# Altium PCB Cap_Sensor_Hand.PcbDoc
Units mil, origin at the board's own origin, x right, y up, seen from the top; angles counter-clockwise.
Board outline 6000 x 4000 mil, 2 copper layers (Top Layer, Bottom Layer); 44 components, 74 nets, 256 pads, 0 vias.
Unrouted connection lines stored in the file: 159.
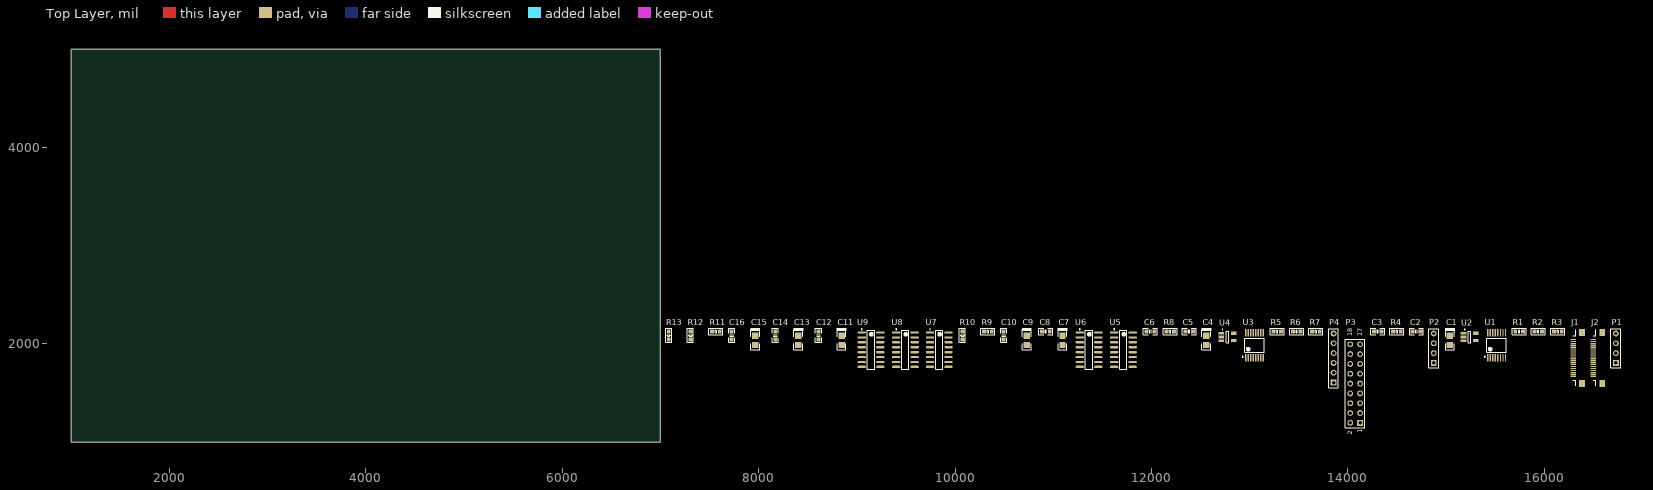
[diagram p0: Top Layer view]
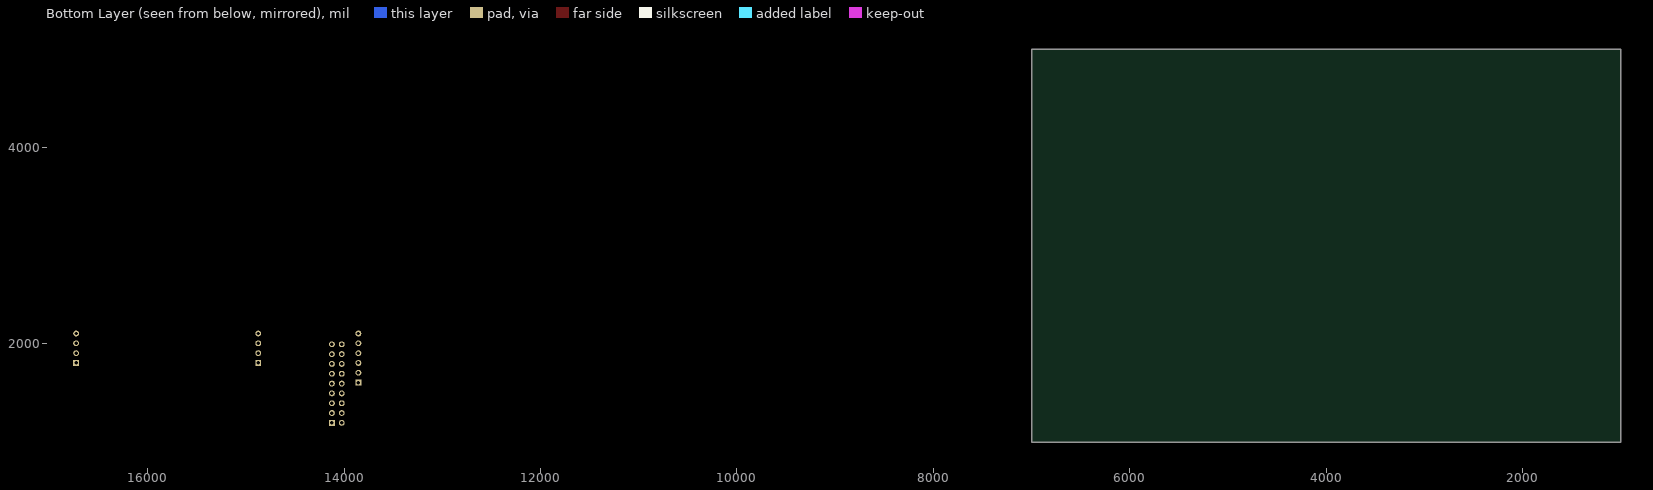
[diagram p1: Bottom Layer view, seen from below]

## Layer stack, top to bottom
Top Solder: solder mask 0.4, Solder Resist, Dk 3.5
Top Layer: signal copper 1.4
Dielectric 1: dielectric 12.6, FR-4, Dk 4.8
Bottom Layer: signal copper 1.4
Bottom Solder: solder mask 0.4, Solder Resist, Dk 3.5

## Board outline
1000,1000 7000,1000 7000,5000 1000,5000

## Design rules (kind name [scope] priority, off if disabled: settings)
Clearance [All] p1: gap=10 ignorepadtopadclearanceinfootprint=FALSE except(0: Arc-Hole Track-Hole SMDPad-Hole THPad-Hole Via-Hole Fill-Hole Poly-Hole Region-Hole Text-Hole)
PolygonConnect [All] p1: connectstyle=Relief reliefconductorwidth=10 reliefentries=4 polygonreliefangle="90 Angle" airgapwidth=10
RoomDefinition Cap_Sensor_Hand [InComponentClass('Cap_Sensor_Hand')] p1: confinementstyle=ConfineIn formatcopy=TRUE lockcomponents=FALSE outline 7045,1060 16790,1060 16790,2265 7045,2265
RoutingVias [All] p1: holewidth=28 width=50 viastyle="Through Hole" minholewidth=28 minwidth=50 maxholewidth=28 maxwidth=50
SolderMaskExpansion [All] p1: expansion=4
Width [All] p1: maxlimit=10 minlimit=10 preferedwidth=10
30 further rules are at their usual default settings.

## Components (designator, comment, footprint, x,y, rotation, side; value= is the part's Value field where it differs from the comment)
C1 "Cap Pol2" Cap-TA 15040,2035 r90 top value=10uF
C2 "Cap" 0805C 14700,2125 r0 top value=100nF
C3 "Cap" 0805C 14305,2125 r0 top value=100nF
C4 "Cap Pol2" Cap-TA 12560,2035 r90 top value=10uF
C5 "Cap" 0805C 12385,2125 r0 top value=100nF
C6 "Cap" 0805C 11990,2125 r0 top value=100nF
C7 "Cap Pol2" Cap-TA 11095,2035 r90 top value=10uF
C8 "Cap" 0805C 10925,2125 r0 top value=100nF
C9 "Cap Pol2" Cap-TA 10730,2035 r90 top value=10uF
C10 "Cap" 0805C 10495,2085 r90 top value=100nF
C11 "Cap Pol2" Cap-TA 8845,2035 r90 top value=10uF
C12 "Cap" 0805C 8610,2085 r90 top value=100nF
C13 "Cap Pol2" Cap-TA 8405,2035 r90 top value=10uF
C14 "Cap" 0805C 8170,2085 r90 top value=100nF
C15 "Cap Pol2" Cap-TA 7965,2035 r90 top value=10uF
C16 "Cap" 0805C 7725,2085 r90 top value=100nF
J1 "FPC-20P" FPC20-0.5 16295,1670 r90 top
J2 "FPC-20P" FPC20-0.5 16500,1670 r90 top
P1 "Header 4" HDR1X4 16730,1805 r90 top
P2 "Header 4" HDR1X4 14875,1805 r90 top
P3 "Header 9X2" HDR2X9 14125,1195 r90 top
P4 "Header 6" HDR1X6 13855,1605 r90 top
R1 "Res" 0805R 15745,2125 r0 top value=100k
R2 "Res" 0805R 15940,2125 r0 top value=3k3
R3 "Res" 0805R 16140,2125 r0 top value=3k3
R4 "Res" 0805R 14500,2125 r0 top value=118k
R5 "Res" 0805R 13280,2125 r0 top value=100k
R6 "Res" 0805R 13480,2125 r0 top value=3k3
R7 "Res" 0805R 13675,2125 r0 top value=3k3
R8 "Res" 0805R 12190,2125 r0 top value=118k
R9 "Res" 0805R 10335,2125 r0 top value=0R
R10 "Res" 0805R 10075,2085 r90 top value=0R
R11 "Res" 0805R 7565,2125 r0 top value=0R
R12 "Res" 0805R 7305,2085 r90 top value=0R
R13 "Res" 0805R 7085,2085 r90 top value=0R
U1 "AD7746" TSSOP16 15515,1985 r90 top
U2 "AD8515" sot23-5 15240,2070 r0 top
U3 "AD7746" TSSOP16 13050,1985 r90 top
U4 "AD8515" sot23-5 12775,2070 r0 top
U5 "CD4052" sop16 11715,1940 r0 top
U6 "CD4052" SOP16 11365,1940 r0 top
U7 "CD4052" sop16 9840,1940 r0 top
U8 "CD4052" sop16 9495,1940 r0 top
U9 "CD4052" sop16 9145,1940 r0 top

## Footprints (in the part's own frame and the unit in brackets; to place one, negate y for a bottom-side part, rotate by r counter-clockwise, add the part's x,y. Pads: shape width x height; smd on the part's side, far side on the other; paste and mask are expansions set on the pad)
0805C [mm]
  rect 1x1 smd: 1(-1,0) 2(1,0)
  silkscreen extent -1.8,-0.8 1.8,0.8, body extent -1.01,-0.62 1,0.63, height 0.92
0805R [mm]
  rect 1x1 smd: 1(-1,0) 2(1,0)
  silkscreen extent -1.8,-0.8 1.8,0.8, body extent -1,-0.63 1,0.63, height 0.55
Cap-TA [mm]
  rect 1.6x1.65 smd: 1(1.2,0) 2(-1.2,0)
  silkscreen extent -2.41,-1.27 3.17,1.27, body extent -1.6,-0.8 1.6,0.8, height 1.61
FPC20-0.5 [mm]
  rect 0.3x1.4 smd: 1(0,0) 2(0.5,0) 3(1,0) 4(1.5,0) 5(2,0) 6(2.5,0) 7(3,0) 8(3.5,0) 9(4,0) 10(4.5,0) 11(5,0) 12(5.5,0) 13(6,0) 14(6.5,0) 15(7,0) 16(7.5,0) 17(8,0) 18(8.5,0) 19(9,0) 20(9.5,0)
  rect 1.8x1.5 smd: 21(-1.85,-2.3) 22(11.35,-2.3)
  silkscreen extent -2.48,-0.64 11.98,0.06
HDR1X4 [mm] "Connector; Header; 4 Position"
  rect 1.5x1.5 hole 0.9: 1(0,0)
  round 1.5 hole 0.9: 2(2.54,0) 3(5.08,0) 4(7.62,0)
  silkscreen extent -1.27,-1.27 8.89,1.27
HDR1X6 [mm] "Connector; Header; 6 Position"
  rect 1.5x1.5 hole 0.9: 1(0,0)
  round 1.5 hole 0.9: 2(2.54,0) 3(5.08,0) 4(7.62,0) 5(10.16,0) 6(12.7,0)
  silkscreen extent -1.27,-1.27 13.97,1.27
HDR2X9 [mm] "Connector; Header; 9x2 Position"
  rect 1.5x1.5 hole 0.9: 1(0,0)
  round 1.5 hole 0.9: 2(0,2.54) 3(2.54,0) 4(2.54,2.54) 5(5.08,0) 6(5.08,2.54) 7(7.62,0) 8(7.62,2.54) 9(10.16,0) 10(10.16,2.54) 11(12.7,0) 12(12.7,2.54) 13(15.24,0) 14(15.24,2.54) 15(17.78,0) 16(17.78,2.54) 17(20.32,0) 18(20.32,2.54)
  silkscreen extent -1.27,-1.27 21.59,3.81
sop16 [mm] "SOP, 16-Leads, Body 10.0x4.0mm (max), Pitch 1.27mm, IPC Medium Density"
  oval 2.15x0.6 smd: 1(-2.4,4.445) 2(-2.4,3.175) 3(-2.4,1.905) 4(-2.4,0.635) 5(-2.4,-0.635) 6(-2.4,-1.905) 7(-2.4,-3.175) 8(-2.4,-4.445) 9(2.4,-4.445) 10(2.4,-3.175) 11(2.4,-1.905) 12(2.4,-0.635) 13(2.4,0.635) 14(2.4,1.905) 15(2.4,3.175) 16(2.4,4.445)
  silkscreen extent -2.52,-5 0.92,5.42, body extent -2,-5 2,5, height 1.75
SOP16 [mm] "SOP, 16-Leads, Body 10.0x4.0mm (max), Pitch 1.27mm, IPC Medium Density"
  oval 2.15x0.6 smd: 1(-2.4,4.445) 2(-2.4,3.175) 3(-2.4,1.905) 4(-2.4,0.635) 5(-2.4,-0.635) 6(-2.4,-1.905) 7(-2.4,-3.175) 8(-2.4,-4.445) 9(2.4,-4.445) 10(2.4,-3.175) 11(2.4,-1.905) 12(2.4,-0.635) 13(2.4,0.635) 14(2.4,1.905) 15(2.4,3.175) 16(2.4,4.445)
  silkscreen extent -2.52,-5 0.92,5.42, body extent -2,-5 2,5, height 1.75
sot23-5 [mm]
  rect 1.5x0.7 smd: 1(-1.595,0.95) 2(-1.595,0) 3(-1.595,-0.95)
  rect 1.5x0.85 smd: 4(1.595,-0.95) 5(1.595,0.95)
  silkscreen extent -1.42,-1.5 0.3,2.05, body extent -1.39,-1.46 1.41,1.44, height 1.09
TSSOP16 [mm]
  oval 2x0.3 smd: 1(-3.25,2.275) 2(-3.25,1.625) 3(-3.25,0.975) 4(-3.25,0.325) 5(-3.25,-0.325) 6(-3.25,-0.975) 7(-3.25,-1.625) 8(-3.25,-2.275) 9(3.25,-2.275) 10(3.25,-1.625) 11(3.25,-0.975) 12(3.25,-0.325) 13(3.25,0.325) 14(3.25,0.975) 15(3.25,1.625) 16(3.25,2.275)
  silkscreen extent -3.12,-2.55 1.83,3.17, body extent -2.85,-2.56 2.85,2.54, height 1.45

## Part data
C1 C4 C7 C9 C11 C13 C15: "Polarized Capacitor (Axial)", LatestRevisionDate=17-Jul-2002, LatestRevisionNote="Re-released for DXP Platform.", PackageDescription="Polarized Capacitor; 2 Leads", PackageReference=POLAR0.8, Published=8-Jun-2000, Publisher="Altium Limited"
C2 C3 C5 C6 C8 C10 C12 C14 C16: "Capacitor", LatestRevisionDate=17-Jul-2002, LatestRevisionNote="Re-released for DXP Platform.", PackageDescription="Radial Cap, Thru-Hole; 2 Leads; 0.3 in Pin Spacing", PackageReference=RAD-0.3, Published=8-Jun-2000, Publisher="Altium Limited"
J1 J2: library part FPC_20P
P1 P2: "Header, 4-Pin", LatestRevisionDate=17-Jul-2002, LatestRevisionNote="Re-released for DXP Platform.", Publisher="Altium Limited"
P3: "Header, 9-Pin, Dual row", LatestRevisionDate=17-Jul-2002, LatestRevisionNote="Re-released for DXP Platform.", Publisher="Altium Limited"
P4: "Header, 6-Pin", LatestRevisionDate=17-Jul-2002, LatestRevisionNote="Re-released for DXP Platform.", Publisher="Altium Limited"
R1 R2 R3 R4 R5 R6 R7 R8 R9 R10 R11 R12 R13: "Resistor", LatestRevisionDate=17-Jul-2002, LatestRevisionNote="Re-released for DXP Platform.", PackageDescription="Axial Device, Thru-Hole; 2 Leads; 0.4 in Pin Spacing", PackageReference=AXIAL-0.4, Published=8-Jun-2000, Publisher="Altium Limited"

## Nets (pads, with @x,y where several pads share a name; then routed paths per layer and width w, separated by ;. In a path a pad name is that pad's centre, name@x,y a point inside that pad or via, vN(x,y) a via of type N, cw(c..) or ccw(c..) an arc to the next point about the centre after c; other vN are vias at no path point)
AD7746_A_SCL: P4.1 R2.1 U1.1
AD7746_A_SDA: P4.2 R3.1 U1.16
AD7746_B_SCL: P4.4 R6.1 U3.1
AD7746_B_SDA: P4.5 R7.1 U3.16
GND: C1.2 C2.1 C3.1 C4.2 C5.1 C6.1 C7.2 C8.1 C9.2 C10.1 C11.2 C12.1 C13.2 C14.1 C15.2 C16.1 P1.3 P1.4 P2.3 P2.4 R9.2 R10.2 R11.2 R12.2 R13.2 U1.13 U2.2 U3.13 U4.2 U5.7 U5.8 U6.7 U6.8 U7.7 U7.8 U8.7 U8.8 U9.7 U9.8
NetR1_1: R1.1 U1.3
NetR1_2: R1.2 R4.1 U2.3
NetR4_2: R4.2 U1.4
NetR5_1: R5.1 U3.3
NetR5_2: R5.2 R8.1 U4.3
NetR8_2: R8.2 U3.4
RDY_A: P4.3 U1.2
RDY_B: P4.6 U3.2
Switch1_A: P3.1 U6.10
Switch1_B: P3.3 U6.9
Switch1_INH: P3.5 R10.1 U6.6
Switch2_A: P3.7 U5.10
Switch2_B: P3.9 U5.9
Switch2_INH: P3.11 R9.1 U5.6
Switch3_A: P3.13 U9.10
Switch3_B: P3.15 U9.9
Switch3_INH: P3.17 R13.1 U9.6
Switch4_A: P3.2 U8.10
Switch4_B: P3.4 U8.9
Switch4_INH: P3.6 R12.1 U8.6
Switch5_A: P3.8 U7.10
Switch5_B: P3.10 U7.9
Switch5_INH: P3.12 R11.1 U7.6
Switch_Down_A: U1.8 U5.3 U6.3
Switch_Down_B: U3.8 U7.3 U8.3 U9.3
Switch_Down_CH0: J1.1 U6.1
Switch_Down_CH1: J1.2 U6.5
Switch_Down_CH2: J1.3 U6.2
Switch_Down_CH3: J1.4 U6.4
Switch_Down_CH4: J1.5 U5.1
Switch_Down_CH5: J1.6 U5.5
Switch_Down_CH6: J1.7 U5.2
Switch_Down_CH7: J1.8 U5.4
Switch_Down_CH8: J1.9 U9.1
Switch_Down_CH9: J1.10 U9.5
Switch_Down_CH10: J1.11 U9.2
Switch_Down_CH11: J1.12 U9.4
Switch_Down_CH12: J1.13 U8.1
Switch_Down_CH13: J1.14 U8.5
Switch_Down_CH14: J1.15 U8.2
Switch_Down_CH15: J1.16 U8.4
Switch_Down_CH16: J1.17 U7.1
Switch_Down_CH17: J1.18 U7.5
Switch_Down_CH18: J1.19 U7.2
Switch_Down_CH19: J1.20 U7.4
Switch_Up_A: U2.1 U2.4 U5.13 U6.13
Switch_Up_B: U4.1 U4.4 U7.13 U8.13 U9.13
Switch_Up_CH0: J2.1 U6.12
Switch_Up_CH1: J2.2 U6.14
Switch_Up_CH2: J2.3 U6.15
Switch_Up_CH3: J2.4 U6.11
Switch_Up_CH4: J2.5 U5.12
Switch_Up_CH5: J2.6 U5.14
Switch_Up_CH6: J2.7 U5.15
Switch_Up_CH7: J2.8 U5.11
Switch_Up_CH8: J2.9 U9.12
Switch_Up_CH9: J2.10 U9.14
Switch_Up_CH10: J2.11 U9.15
Switch_Up_CH11: J2.12 U9.11
Switch_Up_CH12: J2.13 U8.12
Switch_Up_CH13: J2.14 U8.14
Switch_Up_CH14: J2.15 U8.15
Switch_Up_CH15: J2.16 U8.11
Switch_Up_CH16: J2.17 U7.12
Switch_Up_CH17: J2.18 U7.14
Switch_Up_CH18: J2.19 U7.15
Switch_Up_CH19: J2.20 U7.11
VDD_3V3: C7.1 C8.2 C9.1 C10.2 C11.1 C12.2 C13.1 C14.2 C15.1 C16.2 P2.1 P2.2 U5.16 U6.16 U7.16 U8.16 U9.16
VDD_5V: C1.1 C2.2 C3.2 C4.1 C5.2 C6.2 P1.1 P1.2 R2.2 R3.2 R6.2 R7.2 U1.14 U2.5 U3.14 U4.5
pads on no net: J1.21 J1.22 J2.21 J2.22 P3.14 P3.16 P3.18 U1.5 U1.6 U1.7 U1.9 U1.10 U1.11 U1.12 U1.15 U3.5 U3.6 U3.7 U3.9 U3.10 U3.11 U3.12 U3.15

## Text inside footprints (layer, text, board x,y; h text height)
P3: Top Overlay "18" at 14045,2075 h50 r90; Top Overlay "17" at 14145,2075 h50 r90; Top Overlay "1" at 14145,1095 h50 r90; Top Overlay "2" at 14045,1075 h50 r90